# EAGLE board 2015-11-14_13-10-41 (EAGLE 6.4)
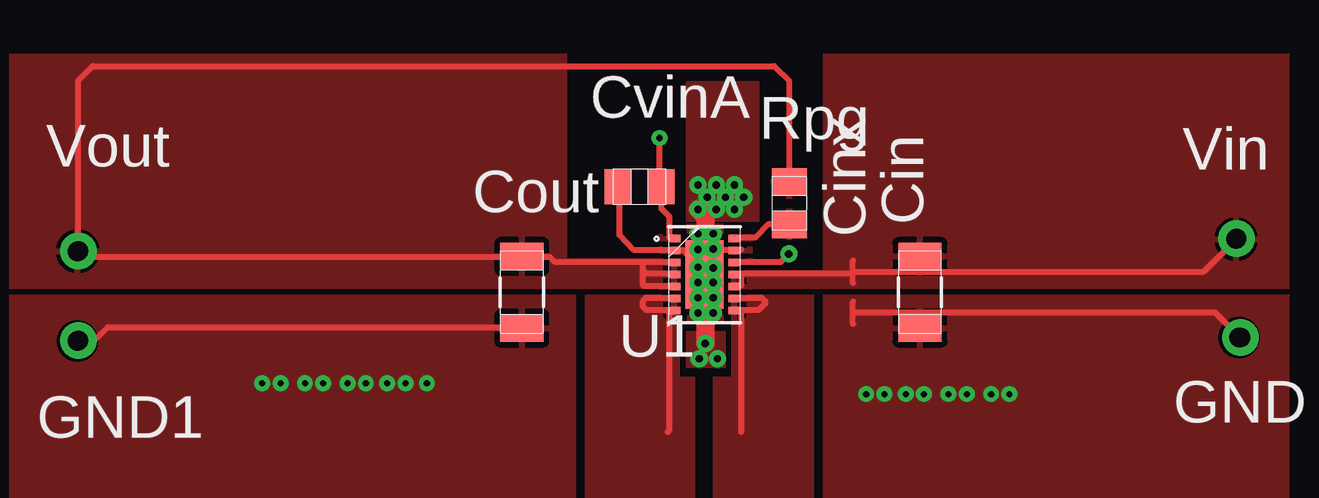
[diagram p0: board, top side]
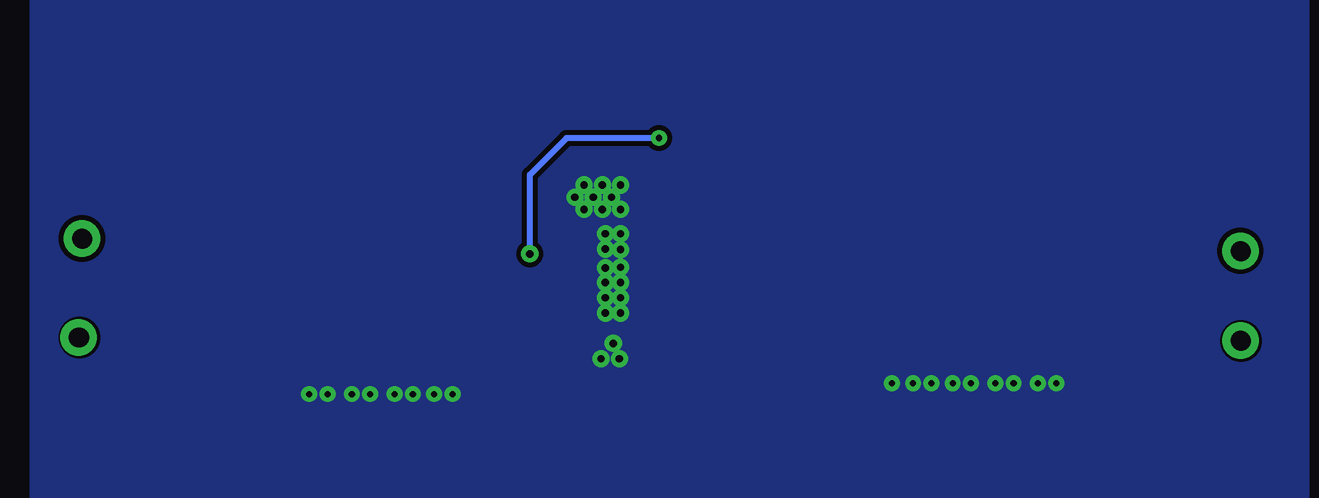
[diagram p1: board, bottom side, seen from below]

No outline drawn. Coordinates in mm, seen from the top.
Copper layers ((1*2)+(15*16)): TOP / INTERNAL1 / layer 15 / BOTTOM

## Footprints (pad centres in the part's own frame; a part is rotated, then mirrored left to right if it is on the bottom)
1206_190 = smd 1.118 x 1.803: 1 -1.499,0; 2 1.499,0
0805 = smd 1.118 x 1.448: 1 -0.902,0; 2 0.902,0
TP-1502 = drill 0.813 round: 1 0,0
R-PVSON-N14 = smd 0.5 x 0.3: 1 -1.25,1.5; 2 -1.25,1; 3 -1.25,0.5; 4 -1.25,0; 5 -1.25,-0.5; 6 -1.25,-1; 7 -1.25,-1.5; 8 1.25,-1.5; 9 1.25,-1; 10 1.25,-0.5; 11 1.25,0; 12 1.25,0.5; 13 1.25,1; 14 1.25,1.5 | smd 1.58 x 2.85: 15 0,0

## Placement (x,y rotation side)
Cin  [1206_190]  63.98,51.03 270 top
Cout  [1206_190]  47.4,51.03 270 top
CvinA  [0805]  52.3,55.42 0 top
GND  [TP-1502]  77.29,49.15 90 top
GND1  [TP-1502]  28.88,49 90 top
L1  [MLP2520K-M]  54.97,46.28 180 top
Rpg  [0805]  58.55,54.74 270 top
U1  [R-PVSON-N14]  55.02,51.77 0 top
Vin  [TP-1502]  77.17,53.24 90 top
Vout  [TP-1502]  28.88,52.73 90 top

## Library data of the parts
Cin = ultra-librarian; RefDes: Cin; Type: GRM31CR61A226KE19L
Cout = ultra-librarian; RefDes: Cout; Type: GRM31CR60J476ME19L
CvinA = ultra-librarian; RefDes: CvinA; Type: 08053C104KAT2A
GND = ultra-librarian; RefDes: GND; Type: TP-1502
GND1 = ultra-librarian; RefDes: GND1; Type: TP-1502
L1 = ultra-librarian; RefDes: L1; Type: MLP2520K1R0ST
Rpg = ultra-librarian; RefDes: Rpg; Type: 08051A100CAT2A
U1 = ultra-librarian; RefDes: U1; Type: TPS63021DSJR
Vin = ultra-librarian; RefDes: Vin; Type: TP-1502
Vout = ultra-librarian; RefDes: Vout; Type: TP-1502

## Nets
0: Cin.2 Cout.2 CvinA.2 U1.2 U1.13 U1.15
1: Cout.1 Rpg.1 U1.3 U1.4 U1.5 Vout.1
2: L1.2 U1.8 U1.9
3: CvinA.1 GND1.1 GND.1 U1.1 U1.12
4: Cin.1 U1.10 U1.11 Vin.1
5: L1.1 U1.6 U1.7
12: Rpg.2 U1.14

## Tracks (layer width: path | path; a pad name or v marks a point on that pad's centre or on a via)
0  (via drill 0.25 pad 0.66, 0.3 pad 0.56, 0.81 pad 1.52)
  TOP 0.254: v28.91,49.02 29.59,49.02 30.15,49.58 48.01,49.58 | 55.68,52.81 56.54,52.81 | v77.34,49.15 76.28,50.19 63.5,50.19 61.21,50.19 | 51.46,55.45 51.46,53.42 52.05,52.81 53.54,52.81 53.57,52.78 54.1,52.78 55.04,51.84 55.04,51.82 | 61.2,49.71 61.2,50.65
  TOP 0.762: v54.74,54.48 55.04,54.15 55.04,51.84 | v55.04,48.9 55.04,51.82
  other vias: 36.58,47.24 38.35,47.24 40.89,47.24 40.13,47.24 42.55,47.24 54.79,48.26 55.12,54.99 56.64,54.99 56.26,54.48 62.51,46.79 65.18,46.79 66.95,46.79 54.74,55.5 56.26,55.5 37.34,47.24 39.12,47.24 41.78,47.24 43.43,47.24 55.55,48.26 55.88,54.99 55.5,54.48 64.16,46.79 63.4,46.79 67.72,46.79 65.94,46.79 61.75,46.79 55.5,55.5 55.37,53.47 54.74,53.47 54.74,52.81 54.74,52.07 54.74,51.44 54.74,50.8 54.74,50.16 55.37,52.83 55.37,52.04 55.37,51.44 55.37,50.8 55.37,50.16
  pour TOP (rank 5): 50.8,54.71 50.8,56.21 52.1,56.21 52.1,54.71
  pour TOP (rank 6): 53.09,52.65 53.09,52.93 53.98,52.93 53.98,52.65
  pour TOP (rank 6): 56.11,52.65 56.11,52.93 57,52.93 57,52.65
  pour TOP (rank 6): 54.28,49.73 54.28,53.87 55.8,53.87 55.8,49.73
  pour TOP (rank 6): 59.94,50.93 59.94,40.13 79.38,40.13 79.38,50.93
  pour TOP: 49.66,50.93 26.04,50.93 26.04,40.13 49.66,40.13
  pour TOP: 54.23,53.98 57.28,53.98 57.28,59.82 54.23,59.82
  pour TOP: 54.23,49.4 55.88,49.4 55.88,47.88 54.23,47.88
  pour BOTTOM: 79.38,75.56 26.04,75.56 26.04,26.04 79.38,26.04
1  (via drill 0.81 pad 1.52)
  TOP 0.254: 58.55,55.75 58.55,59.82 57.91,60.45 29.52,60.45 28.91,59.84 v28.91,52.76 29.13,52.5 48.01,52.5 48.56,52.5 48.77,52.3 52.45,52.3 | 52.45,52.3 53.54,52.3 | 52.45,51.94 52.45,52.3 | 52.45,51.94 52.58,51.82 53.54,51.82 | 52.45,51.94 52.45,51.31 53.52,51.31 53.54,51.31
  pour TOP: 53.09,52.17 53.09,52.45 53.98,52.45 53.98,52.17
  pour TOP (rank 2): 53.09,51.16 53.09,51.44 53.98,51.44 53.98,51.16
  pour TOP (rank 3): 53.09,51.66 53.09,51.94 53.98,51.94 53.98,51.66
  pour TOP (rank 4): 57.78,54.91 57.78,56.21 59.28,56.21 59.28,54.91
  pour TOP (rank 5): 53.98,51.18 26.04,51.18 26.04,60.96 49.28,60.96 49.28,52.45 53.98,52.45
2
  TOP 0.254: 56.54,45.21 56.54,50.29 57.28,50.29 57.53,50.55 57.53,50.67 57.38,50.8 56.54,50.8 | 56.54,45.21
  pour TOP (rank 3): 56.11,50.16 56.11,50.44 57,50.44 57,50.16
  pour TOP (rank 3): 56.11,50.67 56.11,50.95 57,50.95 57,50.67
  pour TOP (rank 5): 56.13,50.93 59.56,50.93 59.56,40.13 55.37,40.13 55.37,47.5 56.13,47.5
3  (via drill 0.25 pad 0.56, 0.3 pad 0.56)
  TOP 0.254: v53.14,57.45 53.14,55.5 53.16,55.47 53.21,55.42 53.21,54.51 53.54,54.18 53.54,53.31 | 56.54,52.3 58.19,52.3 v58.52,52.63
  BOTTOM 0.254: v53.14,57.45 57,57.45 58.52,55.93 v58.52,52.63
  pour TOP: 52.5,54.71 52.5,56.21 53.8,56.21 53.8,54.71
  pour TOP: 53.09,53.16 53.09,53.44 53.98,53.44 53.98,53.16
  pour TOP: 56.11,52.17 56.11,52.45 57,52.45 57,52.17
4  (via drill 0.81 pad 1.52)
  TOP 0.254: 56.54,51.31 56.54,51.82 61.11,51.82 61.21,51.89 63.5,51.89 75.82,51.89 v77.19,53.26 | 61.2,51.41 61.2,52.35
  pour TOP (rank 3): 56.11,51.16 56.11,51.44 57,51.44 57,51.16
  pour TOP (rank 4): 56.11,51.66 56.11,51.94 57,51.94 57,51.66
  pour TOP (rank 5): 79.38,51.18 56.13,51.18 56.13,51.94 59.94,51.94 59.94,60.96 79.38,60.96
5
  TOP 0.254: 53.47,45.21 53.54,45.29 53.54,50.29 53.52,50.29 52.58,50.29 52.45,50.42 52.45,50.67 52.58,50.8 53.54,50.8
  pour TOP (rank 2): 53.09,50.67 53.09,50.95 53.98,50.95 53.98,50.67
  pour TOP (rank 2): 53.09,50.16 53.09,50.44 53.98,50.44 53.98,50.16
  pour TOP (rank 4): 53.98,50.93 50.04,50.93 50.04,40.13 54.61,40.13 54.61,47.5 53.98,47.5
12
  TOP 0.254: 56.54,53.31 57.12,53.31 57.68,53.87 58.55,53.87
  pour TOP (rank 2): 56.11,53.16 56.11,53.44 57,53.44 57,53.16
  pour TOP (rank 4): 57.78,53.21 57.78,54.51 59.28,54.51 59.28,53.21

## Text on the board
tDocu: Cinx